# Altium PCB VCA_2.PcbDoc
Units mm, origin at the board's own origin, x right, y up, seen from the top; angles counter-clockwise.
Board outline 73 x 110 mm, 2 copper layers (Top Layer, Bottom Layer); 55 components, 37 nets, 158 pads, 0 vias.
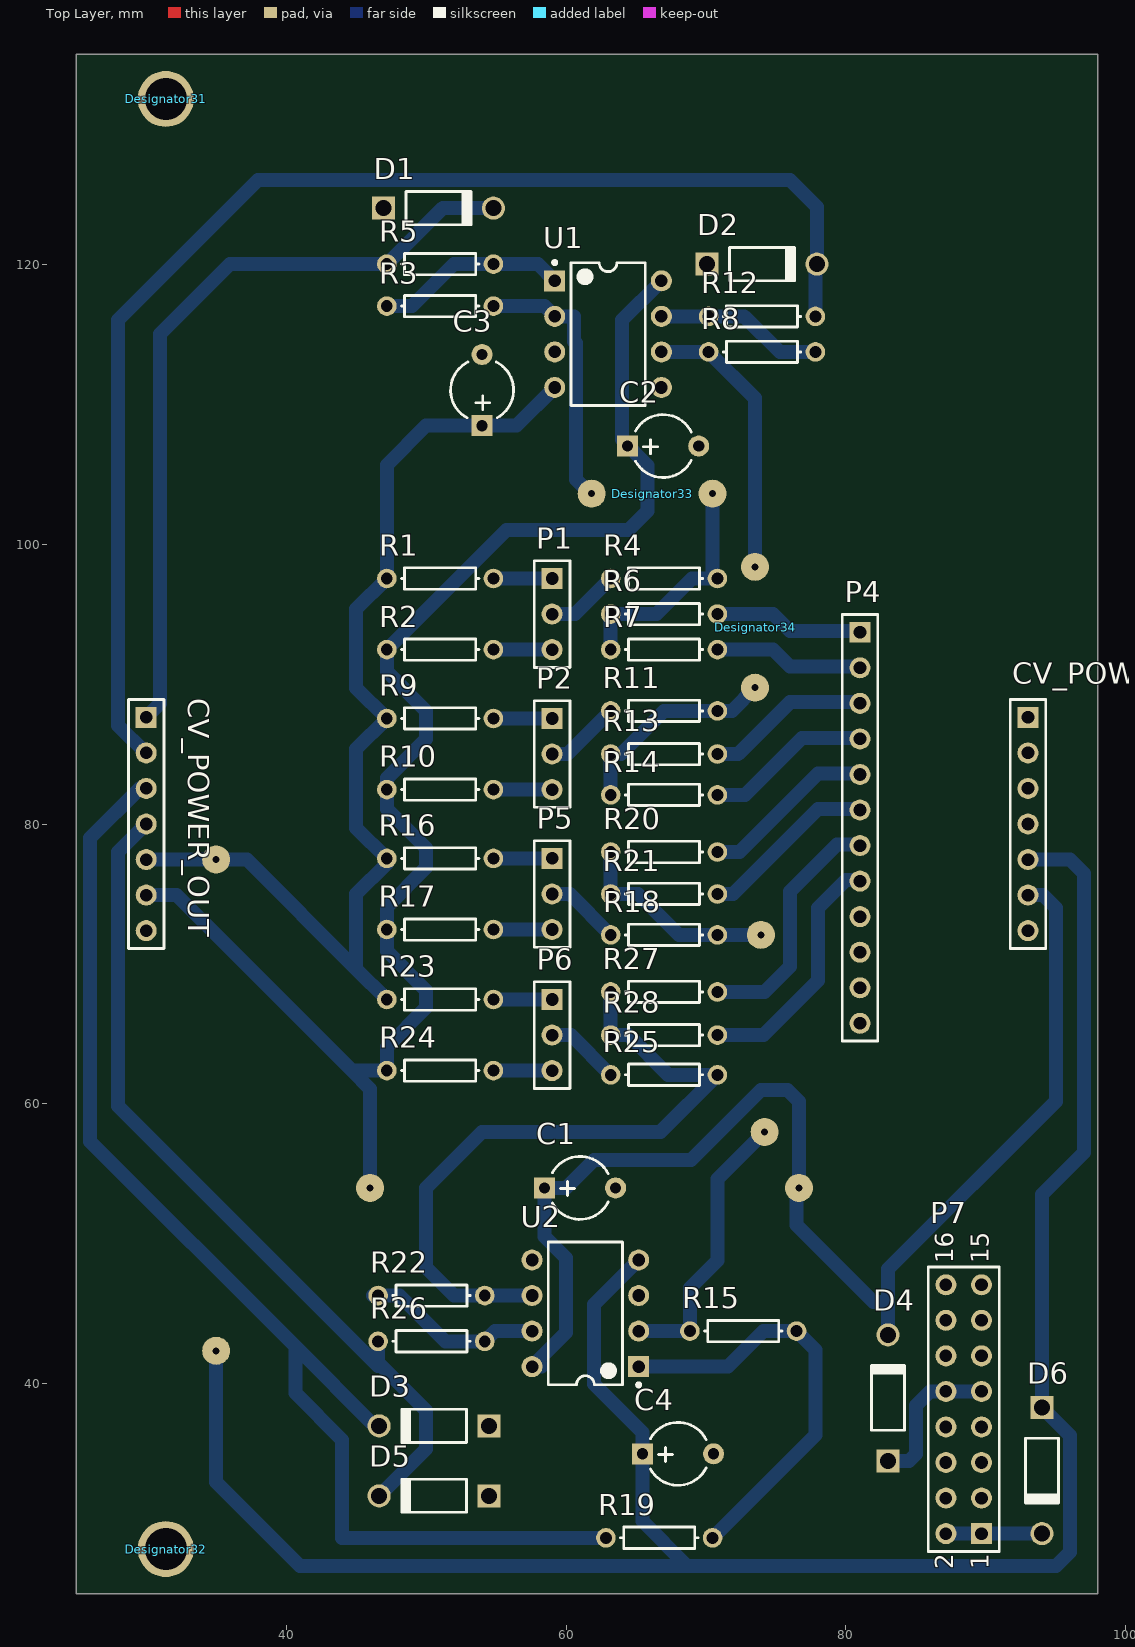
[diagram p0: Top Layer view]
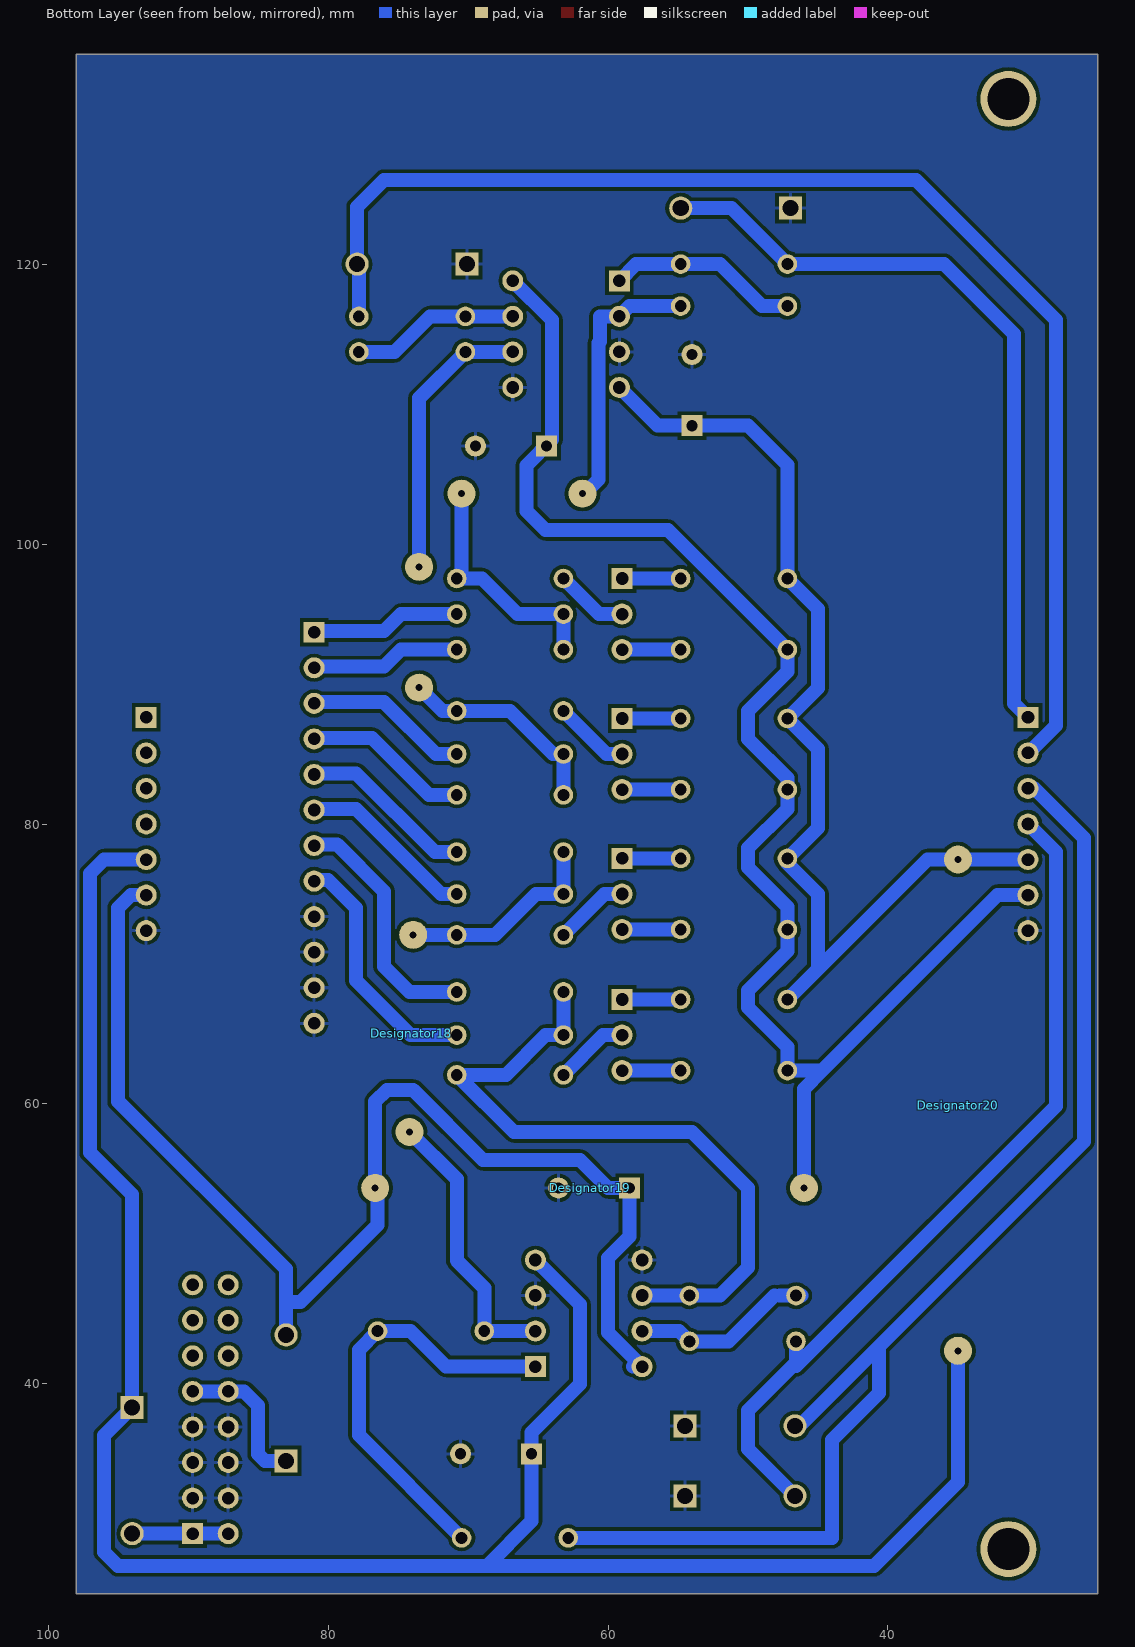
[diagram p1: Bottom Layer view, seen from below]

## Layer stack, top to bottom
Top Solder: solder mask 0.0102, Solder Resist, Dk 3.5
Top Layer: signal copper 0.0356
Dielectric 1: dielectric 0.32, FR-4, Dk 4.8
Bottom Layer: signal copper 0.0356
Bottom Solder: solder mask 0.0102, Solder Resist, Dk 3.5

## Board outline
25,25 25,135 98,135 98,25

## Design rules (kind name [scope] priority, off if disabled: settings)
Clearance [All] p1: gap=0.254 ignorepadtopadclearanceinfootprint=FALSE except(0: Arc-Hole Track-Hole SMDPad-Hole THPad-Hole Via-Hole Fill-Hole Poly-Hole Region-Hole Text-Hole)
PolygonConnect [All] p1: connectstyle=Relief reliefconductorwidth=0.254 reliefentries=4 polygonreliefangle="90 Angle" airgapwidth=0.254
RoutingVias [All] p1: holewidth=0.711 width=1.27 viastyle="Through Hole" minholewidth=0.711 minwidth=1.27 maxholewidth=0.711 maxwidth=1.27
SolderMaskExpansion [All] p1: expansion=0.102
Width [All] p1: maxlimit=2 minlimit=0.254 preferedwidth=1
30 further rules are at their usual default settings.

## Classes and differential pairs
component class VCA_2: C1 C2 C3 C4 CV_POWER_OUT CV_POWER_OUT_2 D1 D2 D3 D4 D5 D6 P1 P2 P4 P5 P6 P7 R1 R2 R3 R4 R5 R6 R7 R8 R9 R10 R11 R12 R13 R14 R15 R16 R17 R18 R19 R20 R21 R22 R23 R24 R25 R26 R27 R28 U1 U2

## Components (designator, comment, footprint, x,y, rotation, side; value= is the part's Value field where it differs from the comment)
C1 "0.1uF" CAPPRB508-450x850 61,54 r0 top
C2 "0.1uF" CAPPRB508-450x850 66.937,107 r0 top
C3 "0.1uF" CAPPRB508-450x850 54,111 r90 top
C4 "0.1uF" CAPPRB508-450x850 68,35 r0 top
CV_POWER_OUT "POWER_CV_OUT" HDR1X7 30,87.62 r270 top
CV_POWER_OUT_2 "POWER_CV_OUT" HDR1X7 93,87.62 r270 top
D1 "1N5817-T" DIOD-DO-41-P-2 50.885,124 r0 top
D2 "1N5817-T" DIOD-DO-41-P-2 74,120 r0 top
D3 "1N5817-T" DIOD-DO-41-P-2 50.57,37 r180 top
D4 "1N4001-T" DIOD-DO-41-P-2_V 83,39 r90 top
D5 "1N5817-T" DIOD-DO-41-P-2 50.57,32 r180 top
D6 "1N4001-T" DIOD-DO-41-P-2_V 94,33.8 r270 top
Designator18 "Comment" Jumper#1 74.19,53 r90 bottom
Designator19 "Comment" Jumper#2 68,54 r0 bottom
Designator20 "Comment" Jumper#3 35,51 r270 bottom
Designator31 "Comment" "621 L bracket" 31.4,131.8 r90 top
Designator32 "Comment" "621 L bracket" 31.4,28.2 r90 top
Designator33 "Comment" Jumper#4 70.466,103.6 r180 top
Designator34 "Comment" Jumper#4 73.5,98.373 r270 top
P1 "Header 3" HDR1X3 59,97.54 r270 top
P2 "Header 3" HDR1X3 59,87.54 r270 top
P4 "Header 12" HDR1X12 81,93.7 r270 top
P5 "Header 3" HDR1X3 59,77.54 r270 top
P6 "Header 3" HDR1X3 59,67.46 r270 top
P7 "Header 8X2" HDR2X8 89.681,29.3 r90 top
R1 "Res1" AXIAL-0.3 51,97.54 r0 top value=1K
R2 "Res1" AXIAL-0.3 51,92.46 r180 top value=1K
R3 "Res1" AXIAL-0.3 51,117 r180 top value=1K
R4 "Res1" AXIAL-0.3 67,97.54 r0 top value=1K
R5 "Res1" AXIAL-0.3 51,120 r180 top value=1K
R6 "Res1" AXIAL-0.3 67,95 r180 top value=1K
R7 "Res1" AXIAL-0.3 67,92.46 r180 top value=1K
R8 "Res1" AXIAL-0.3 74,113.73 r0 top value=1K
R9 "Res1" AXIAL-0.3 51,87.54 r0 top value=1K
R10 "Res1" AXIAL-0.3 51,82.46 r180 top value=1K
R11 "Res1" AXIAL-0.3 67,88.08 r0 top value=1K
R12 "Res1" AXIAL-0.3 74,116.27 r0 top value=1K
R13 "Res1" AXIAL-0.3 67,85 r180 top value=1K
R14 "Res1" AXIAL-0.3 67,82.08 r180 top value=1K
R15 "Res1" AXIAL-0.3 72.656,43.77 r0 top value=1K
R16 "Res1" AXIAL-0.3 51,77.54 r0 top value=1K
R17 "Res1" AXIAL-0.3 51,72.46 r180 top value=1K
R18 "Res1" AXIAL-0.3 67,72.08 r0 top value=1K
R19 "Res1" AXIAL-0.3 66.656,29 r180 top value=1K
R20 "Res1" AXIAL-0.3 67,78 r180 top value=1K
R21 "Res1" AXIAL-0.3 67,75 r180 top value=1K
R22 "Res1" AXIAL-0.3 50.38,46.31 r180 top value=1K
R23 "Res1" AXIAL-0.3 51,67.46 r0 top value=1K
R24 "Res1" AXIAL-0.3 51,62.38 r180 top value=1K
R25 "Res1" AXIAL-0.3 67,62.08 r0 top value=1K
R26 "Res1" AXIAL-0.3 50.38,43.04 r180 top value=1K
R27 "Res1" AXIAL-0.3 67,68 r180 top value=1K
R28 "Res1" AXIAL-0.3 67,64.92 r180 top value=1K
U1 "TL082CN" STM-N8 63,115 r0 top
U2 "TL082CN" STM-N8 61.38,45.04 r180 top

## Footprints (in the part's own frame and the unit in brackets; to place one, negate y for a bottom-side part, rotate by r counter-clockwise, add the part's x,y. Pads: shape width x height; smd on the part's side, far side on the other; paste and mask are expansions set on the pad)
"621 L bracket" [mm] "Keystone Electronics  621  Mounting Brackets"
  round 4 hole 3: 0(0,0)
AXIAL-0.3 [mm] "Axial Device, Thru-Hole; 2 Leads; 0.3 in Pin Spacing"
  round 1.4 hole 0.85: 1(-3.81,0) 2(3.81,0)
  silkscreen extent -2.77,-0.76 2.77,0.76
CAPPRB508-450x850 [mm] "Capacitor, Polarized Radial Bead, Pin spacing 5.08mm - Body Diameter 4.5mm X Body Height 8.5mm"
  rect 1.5x1.5 hole 0.8: 1(-2.54,0)
  round 1.5 hole 0.8: 2(2.54,0)
  silkscreen extent -1.98,-2.25 2.01,2.25, body extent -2.79,-2.25 2.79,2.25, height 8.97
DIOD-DO-41-P-2 [mm] "THD, 2-Leads, Body 4.635x2.36mm, Pin Spacing 7.85mm"
  rect 1.65x1.65 hole 1.15: 1(-3.925,0)
  round 1.65 hole 1.15: 2(3.925,0)
  silkscreen extent -2.32,-1.18 2.32,1.18, body extent -4.36,-1.18 4.36,1.18, height 2.35
DIOD-DO-41-P-2_V [mm] "2-Leads, Axial Lead, Body 4.635x2.36mm, Pin Spacing 9mm"
  rect 1.65x1.65 hole 1.15: 1(-4.5,0)
  round 1.65 hole 1.15: 2(4.5,0)
  silkscreen extent -2.32,-1.18 2.32,1.18, body extent -4.93,-1.18 4.93,1.18, height 2.35
HDR1X3 [mm] "Connector; Header; 3 Position"
  rect 1.5x1.5 hole 0.9: 1(0,0)
  round 1.5 hole 0.9: 2(2.54,0) 3(5.08,0)
  silkscreen extent -1.27,-1.27 6.35,1.27
HDR1X7 [mm] "Connector; Header; 7 Position"
  rect 1.5x1.5 hole 0.9: 1(0,0)
  round 1.5 hole 0.9: 2(2.54,0) 3(5.08,0) 4(7.62,0) 5(10.16,0) 6(12.7,0) 7(15.24,0)
  silkscreen extent -1.27,-1.27 16.51,1.27
HDR1X12 [mm] "Connector; Header; 12 Position"
  rect 1.5x1.5 hole 0.9: 1(0,0)
  round 1.5 hole 0.9: 2(2.54,0) 3(5.08,0) 4(7.62,0) 5(10.16,0) 6(12.7,0) 7(15.24,0) 8(17.78,0) 9(20.32,0) 10(22.86,0) 11(25.4,0) 12(27.94,0)
  silkscreen extent -1.27,-1.27 29.21,1.27
HDR2X8 [mm] "Connector; Header; 8x2 Position"
  rect 1.5x1.5 hole 0.9: 1(0,0)
  round 1.5 hole 0.9: 2(0,2.54) 3(2.54,0) 4(2.54,2.54) 5(5.08,0) 6(5.08,2.54) 7(7.62,0) 8(7.62,2.54) 9(10.16,0) 10(10.16,2.54) 11(12.7,0) 12(12.7,2.54) 13(15.24,0) 14(15.24,2.54) 15(17.78,0) 16(17.78,2.54)
  silkscreen extent -1.27,-1.27 19.05,3.81
Jumper#1 [mm]
  round 2 hole 0.5: 1(5,0) 1(19.08,-0.27)
Jumper#2 [mm]
  round 2 hole 0.5: 1(-22,0) 1(8.636,0)
Jumper#3 [mm]
  round 2 hole 0.5: 1(-26.46,0) 1(8.636,0)
Jumper#4 [mm]
  round 2 hole 0.5: 1(0,0) 1(8.636,0)
STM-N8 [mm] "DIP, 8-Leads, Body 10.15x7.1mm, Pitch 2.54mm"
  rect 1.5x1.5 hole 0.9: 1(-3.81,3.81)
  round 1.5 hole 0.9: 2(-3.81,1.27) 3(-3.81,-1.27) 4(-3.81,-3.81) 5(3.81,-3.81) 6(3.81,-1.27) 7(3.81,1.27) 8(3.81,3.81)
  silkscreen extent -3.93,-5.1 2.65,5.23, body extent -3.95,-5.07 3.95,5.07, height 5.33

## Part data
C1 C2 C3 C4: library part CTEB_0.1UF_35V_10%_508-450X850, "Polarised capacitor", Case="LS5.08 D4.5 x H8.5", Manufacturer=AVX, Manufacturer Part Number=TAP104M035CCS-LF, Tolerance=±10%, Voltage=35V, Author="CERN DEM JLC", ComponentHeight=8.5mm, Component Type=Standard, CreateDate=19/08/2010, HelpURL=\\cern.ch\dfs\Applications\Altium\Datasheets\CTEB_AVX_TAP.pdf, LatestRevisionDate=19/08/2010, Mounted=Yes, Part Description="Solid Tantalum Resin Dipped Capacitor", Part Number=CTEB_0.1UF_35V_10%_508-450X850, Pin Count=2, Sense=No, SMD=No, Socket=No, Status=None
CV_POWER_OUT CV_POWER_OUT_2: library part "Header 7", "Header, 7-Pin", LatestRevisionDate=17-Jul-2002, LatestRevisionNote="Re-released for DXP Platform.", Publisher="Altium Limited"
  CV_POWER_OUT: System=Connector
D1 D2 D3 D5: library part CMP-2000-05521-1, "Schottky Barrier Rectifier, 1 A, 20 V, -65 to 125 degC, 2-Pin DO-41, RoHS, Tape and Reel", If - Forward Current=1A, Ifsm - Forward Surge Current=25A, Ir - Reverse Current=1000uA, Manufacturer=DiodesIncorporated, Maximum Operating Temperature=+125C, Minimum Operating Temperature=-65C, Operating Temperature Range=-65Cto+125C, Package / Case=DO-41, Package Description="2-Pin Through Hole Device, Body 4.635 x 2.36 mm, Pin Spacing 7.85 mm", Package Reference=DO-41-P-2, Vf - Forward Voltage=0.75Vat3A, Vrrm - Repetitive Reverse Voltage=20V, Brand=DiodesIncorporated, Configuration=Single, Datasheet URL=http://www.diodes.com/_files/datasheets/ds23001.pdf, Datasheet Version="Rev. 8-2, 05/2009", Factory Pack Quantity=5000, Height=2.72mm, Length=5.21mm, Manufacturer URL=http://www.diodes.com/, Mounting Style=ThroughHole, Mounting Technology=ThroughHole, Packaging=Reel, Product=SchottkyRectifiers, Product Category=SchottkyDiodes&Rectifiers, RoHS=True, Series=1N58, Technology=Si, Termination Style=ThroughHole, Type=SchottkyDiode, Unit Weight=0.010582oz, Width=2.72mm
D4 D6: library part CMP-0639-00006-1, "1.0 A Rectifier, 15 pF, 50 V, -65 to 150 degC, 2-Pin DO-41 Plastic, RoHS, Tape and Reel", Manufacturer="Diodes Inc", Max. Average Rectified Current IO (A)=1, Operating Temperature Range (degC)="-65 to 150", ComponentLink1Description="Manufacturer URL", ComponentLink1URL=http://diodes.com/, ComponentLink2Description=Datasheet, ComponentLink2URL=http://diodes.com/datasheets/ds28002.pdf, CT (pF)=15, DatasheetVersion="Rev. 8-2", Max. IFSM (A)=30, Max. IR (uA)=5, Mounting Technology="Through Hole", PackageDescription="2-Pin Axial Lead, Body 4.635 x 2.36 mm, Lead Spread 25.4 mm", PackageReference=DO-41-P-2, Packing="Tape and Reel", PartNumber=1N4001-T, RoHS=TRUE, VF (V)=1, VRRM (V)=50
P1 P2 P5 P6: "Header, 3-Pin", LatestRevisionDate=17-Jul-2002, LatestRevisionNote="Re-released for DXP Platform.", Publisher="Altium Limited"
P4: "Header, 12-Pin", LatestRevisionDate=17-Jul-2002, LatestRevisionNote="Re-released for DXP Platform.", Publisher="Altium Limited"
P7: "Header, 8-Pin, Dual row", LatestRevisionDate=17-Jul-2002, LatestRevisionNote="Re-released for DXP Platform.", Publisher="Altium Limited"
R1 R2 R3 R4 R5 R6 R7 R8 R9 R10 R11 R12 R13 R14 R15 R16 R17 R18 R19 R20 R21 R22 R23 R24 R25 R26 R27 R28: "Resistor", LatestRevisionDate=17-Jul-2002, LatestRevisionNote="Re-released for DXP Platform.", PackageDescription="Axial Device, Thru-Hole; 2 Leads; 0.3 in Pin Spacing", PackageReference=AXIAL-0.3, Published=8-Jun-2000, Publisher="Altium Limited"
U1 U2: library part CMP-2000-07247-1, "General Purpose JFET Dual Operational Amplifier, 4 MHz, 6 to 36 V, 0 to 70 degC, 8-Pin DIP (N8), RoHS, Tube", Manufacturer=STMicroelectronics, Manufacturer Type=GeneralPurposeAmplifier, Maximum Dual Supply Voltage=18V, Maximum Input Bias Current=0.0004uA@15V, Maximum Input Offset Voltage=10mV@15V, Maximum Operating Temperature=70C, Maximum Power Dissipation=680mW, Maximum Supply Current=2.5mA@15V, Minimum Dual Supply Voltage=3V, Minimum Operating Temperature=0C, Package Description="8-Pin Double In-line Package, Body 9.59 x 6.605 mm, Pitch 2.54 mm", Package Reference=N8, Power Supply Type=Dual, Supplier_Package=PDIP, Typical Dual Supply Voltage=5V, Typical Input Noise Voltage Density=15nV/rtHz@15V, Typical Voltage Gain=106.02dB, Datasheet URL=https://datasheet.ciiva.com/19471/2002077-19471009.pdf, Datasheet Version="Rev. 10, 06/2008", Family=TL082, Manufacturer URL=http://www.st.com/, Minimum CMRR=70dB, Mounting=ThroughHole, Mounting Technology=ThroughHole, Number of Channels per Chip=2, Packaging=Tube, PartId=1, Pin_Count=8, Product Height=3.3mm, Product Length=9.27mm, Product Type=OPAmp, Product Width=6.35mm, Rail to Rail=No, Shut Down Support=No, Technology=BiFET, Type=GeneralPurposeAmplifier, Typical Gain Bandwidth Product=4MHz, Typical Slew Rate=16V/us@15V

## Nets (pads, with @x,y where several pads share a name; then routed paths per layer and width w, separated by ;. In a path a pad name is that pad's centre, name@x,y a point inside that pad or via, vN(x,y) a via of type N, cw(c..) or ccw(c..) an arc to the next point about the centre after c; other vN are vias at no path point)
+12V: C1.1 C2.1 CV_POWER_OUT.6 CV_POWER_OUT_2.6 D4.2 Designator19.1 R2.2 R10.2 R17.2 R24.2 U1.8 U2.8 | length 201.5
  Bottom Layer w1: CV_POWER_OUT.6 32.16,74.92 44.7,62.38 ; Designator19.1@46,54 46,61.08 44.7,62.38 ; U2.8@58.23,41.23 U2.8 60,43.66 60,49 58.46,50.54 C1.1 60,54 62,56 68.92,56 73.92,61 75.81,61 76.636,60.174 Designator19.1@76.636,54 ; U1.8 64,116 64,107.46 65.832,105.628 65.832,102.372 64.46,101 55.73,101 R2.2 47.19,90.89 50,88.08 50,86.08 47.19,83.27 R10.2 47.19,81.08 50,78.27 50,76.89 47.19,74.08 R17.2 47.19,70.92 50,68.11 50,66.89 47.19,64.08 R24.2 44.7,62.38 ; Designator19.1@76.466,54 76.466,51.344 81.965,45.845 83,45.845 ; D4.2 83,45.845 ; CV_POWER_OUT_2.6 94.08,74.92 95,74 95,60.19 83,48.19 83,45.845
-12V: C3.1 C4.1 CV_POWER_OUT.5 CV_POWER_OUT_2.5 D6.1 Designator20.1 R1.1 R9.1 R16.1 R23.1 U1.4 U2.4 | length 229.9
  Bottom Layer w1: CV_POWER_OUT.5 37.19,77.46 45,69.65 ; Designator20.1@35,42 35,33 41,27 68.656,27 ; R23.1 45,69.65 ; U1.4 56.46,108.46 C3.1 50,108.46 47.19,105.65 R1.1 45,95.35 45,89.73 R9.1 45,85.35 45,79.73 R16.1 47.19,77.19 45,75 45,69.65 ; U2.4 62,45.66 62,40 65.46,36.54 C4.1 65.46,30.196 68.656,27 ; CV_POWER_OUT_2.5 96,77.46 97,76.46 97,56.54 94,53.54 D6.1 96,36.3 96,28 95,27 68.656,27
CV_1_1: P4.1 R6.1 | length 10.7
  Bottom Layer w1: R6.1 74.78,95 76,93.78 80.92,93.78 P4.1
CV_1_2: P4.2 R7.1 | length 10.7
  Bottom Layer w1: R7.1 74.78,92.46 76,91.24 80.92,91.24 P4.2
CV_2_1: P4.3 R13.1 | length 11.8
  Bottom Layer w1: R13.1 72.3,85 76,88.7 80.92,88.7 P4.3
CV_2_2: P4.4 R14.1 | length 11.9
  Bottom Layer w1: R14.1 72.78,82.08 76.86,86.16 80.92,86.16 P4.4
CV_3_1: P4.5 R20.1 | length 12.6
  Bottom Layer w1: R20.1 72.38,78 78,83.62 80.92,83.62 P4.5
CV_3_2: P4.6 R21.1 | length 12.7
  Bottom Layer w1: R21.1 71.92,75 78,81.08 80.92,81.08 P4.6
CV_4_1: P4.7 R27.1 | length 17.7
  Bottom Layer w1: R27.1 74.19,68 76,69.81 76,75.19 79.35,78.54 80.92,78.54 P4.7
CV_4_2: P4.8 R28.1 | length 17.9
  Bottom Layer w1: R28.1 74.11,64.92 78,68.81 78,74 80,76 80.92,76 P4.8
CV_Out1: CV_POWER_OUT.1 D1.2 R5.2 | length 55.3
  Bottom Layer w1: CV_POWER_OUT.1 31,88.62 31,115 36,120 R5.2 51.19,124 D1.2
CV_Out2: CV_POWER_OUT.2 D2.2 R12.2 | length 94.5
  Bottom Layer w1: CV_POWER_OUT.2 29.974,85.08 28,87.054 28,116 38,126 76,126 77.925,124.075 D2.2 77.81,119.885 R12.2
CV_Out3: CV_POWER_OUT.3 D3.2 R19.2 | length 90.1
  Bottom Layer w1: CV_POWER_OUT.3 29.54,82.54 26,79 26,57.31 40.655,42.655 ; D3.2 46.31,37 40.655,42.655 ; R19.2 44,29 44,36 40.655,39.345 40.655,42.655
CV_Out4: CV_POWER_OUT.4 D5.2 R26.2 | length 61.4
  Bottom Layer w1: CV_POWER_OUT.4 28,78 28,59.85 46.57,41.28 46.57,41.54 ; R26.2 46.57,41.54 ; D5.2 50,35.355 50,38.11 46.57,41.54
GND: C1.2 C2.2 C3.2 C4.2 CV_POWER_OUT.7 CV_POWER_OUT_2.7 D1.1 D2.1 D3.1 D5.1 P4.9 P4.10 P4.11 P4.12 P7.3 P7.4 P7.5 P7.6 P7.7 P7.8 U1.3 U1.5 U2.3 U2.5
NetD4_1: D4.1 P7.9 P7.10 | length 10.8
  Bottom Layer w1: D4.1 84.5,34.5 85,35 85,38.46 86,39.46 P7.10 P7.9
NetD6_2: D6.2 P7.1 P7.2 | length 6.9
  Bottom Layer w1: P7.2 P7.1 D6.2
NetP1_1: P1.1 R1.2 | length 4.2
  Bottom Layer w1: R1.2 P1.1
NetP1_2: P1.2 R4.1 | length 5.2
  Bottom Layer w1: P1.2 60.65,95 R4.1
NetP1_3: P1.3 R2.1 | length 4.2
  Bottom Layer w1: R2.1 P1.3
NetP2_1: P2.1 R9.2 | length 4.2
  Bottom Layer w1: R9.2 P2.1
NetP2_2: P2.2 R11.1 | length 5.5
  Bottom Layer w1: P2.2 60.11,85 R11.1
NetP2_3: P2.3 R10.1 | length 4.2
  Bottom Layer w1: R10.1 P2.3
NetP5_1: P5.1 R16.2 | length 4.2
  Bottom Layer w1: R16.2 P5.1
NetP5_2: P5.2 R18.1 | length 5.4
  Bottom Layer w1: P5.2 60.27,75 R18.1
NetP5_3: P5.3 R17.1 | length 4.2
  Bottom Layer w1: R17.1 P5.3
NetP6_1: P6.1 R23.2 | length 4.2
  Bottom Layer w1: R23.2 P6.1
NetP6_2: P6.2 R25.1 | length 5.4
  Bottom Layer w1: P6.2 60.35,64.92 R25.1
NetP6_3: P6.3 R24.1 | length 4.2
  Bottom Layer w1: R24.1 P6.3
NetR3_1: Designator33.1 R3.1 R4.2 R6.2 R7.2 U1.2 | length 36.9
  Bottom Layer w1: R3.1 58.46,117 U1.2 60.571,116.27 60.571,114.476 60.694,114.353 60.694,104.612 Designator33.1@61.903,103.403 ; R7.2 R6.2 66.46,95 69,97.54 R4.2 70.466,97.884 Designator33.1@70.466,103.6
NetR3_2: R3.2 R5.1 U1.1 | length 13.7
  Bottom Layer w1: R3.2 49,117 52,120 R5.1 58,120 U1.1
NetR8_1: Designator34.1 R8.1 R11.2 R13.2 R14.2 U1.6 | length 35.3
  Bottom Layer w1: R14.2 R13.2 63.92,85 67,88.08 R11.2 71.843,88.08 Designator34.1@73.5,89.737 ; U1.6 R8.1 73.5,110.42 Designator34.1@73.5,98.373
NetR8_2: R8.2 R12.1 U1.7 | length 12.1
  Bottom Layer w1: U1.7 R12.1 72.73,116.27 75.27,113.73 R8.2
NetR15_1: Designator18.1 R15.1 R18.2 R20.2 R21.2 U2.2 | length 35.2
  Bottom Layer w1: R20.2 R21.2 65.155,75 68.075,72.08 R18.2 73.92,72.08 Designator18.1@74,72 ; U2.2 R15.1 68.846,46.846 70.81,48.81 70.81,54.62 Designator18.1@74.19,58
NetR15_2: R15.2 R19.1 U2.1 | length 30.7
  Bottom Layer w1: U2.1 71.57,41.23 74.11,43.77 R15.2 77.81,42.426 77.81,36.344 R19.1
NetR22_1: R22.1 R25.2 R27.2 R28.2 U2.6 | length 50.1
  Bottom Layer w1: U2.6 R22.1 52,46.31 50,48.31 50,54 54,58 66.73,58 R25.2 67.3,62.08 64.46,64.92 R28.2 R27.2
NetR22_2: R22.2 R26.1 U2.7 | length 12.7
  Bottom Layer w1: R22.2@46.19,46.31 47.73,46.31 ; 48.11,46.31 51.38,43.04 R26.1 54.92,43.77 U2.7
pads on no net: CV_POWER_OUT_2.1 CV_POWER_OUT_2.2 CV_POWER_OUT_2.3 CV_POWER_OUT_2.4 Designator31.0 Designator32.0 P7.11 P7.12 P7.13 P7.14 P7.15 P7.16

## Polygon pours and split planes (outlines as drawn)
GND on Bottom Layer "GND" (solid, pour order 0): 25,135 25,25 98,25 98,135

## Text inside footprints (layer, text, board x,y; h text height)
P7: Top Overlay "2" at 87.649,26.76 h1.27 r90; Top Overlay "1" at 90.189,26.76 h1.27 r90; Top Overlay "15" at 90.189,48.604 h1.27 r90; Top Overlay "16" at 87.649,48.604 h1.27 r90